# Altium PCB micro_pcb.PcbDoc
Units mil, origin at the board's own origin, x right, y up, seen from the top; angles counter-clockwise.
Board outline 2100 x 1500 mil, 4 copper layers (Top Layer, Power Plane, Ground Plane, Bottom Layer), stack 61.6 mil thick; 32 components, 49 nets, 227 pads, 0 vias.
Unrouted connection lines stored in the file: 34.
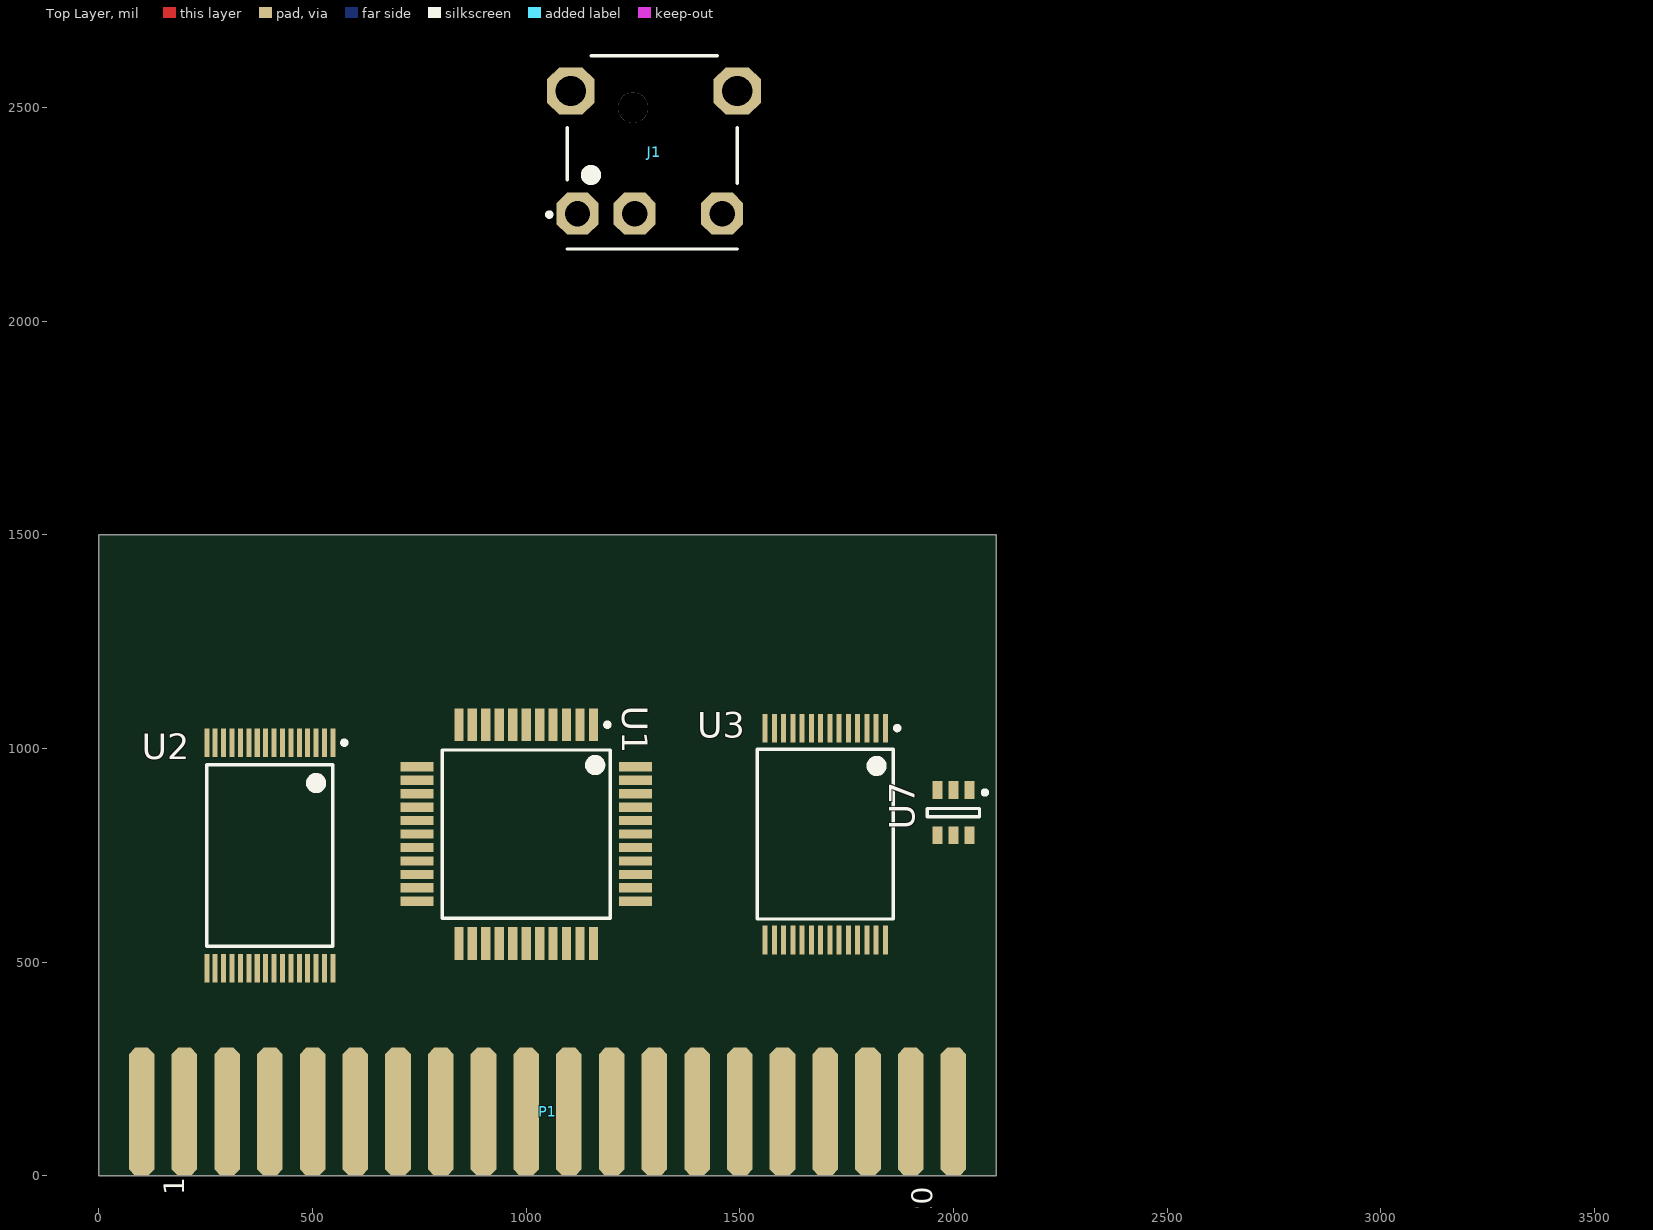
[diagram p0: Top Layer view]
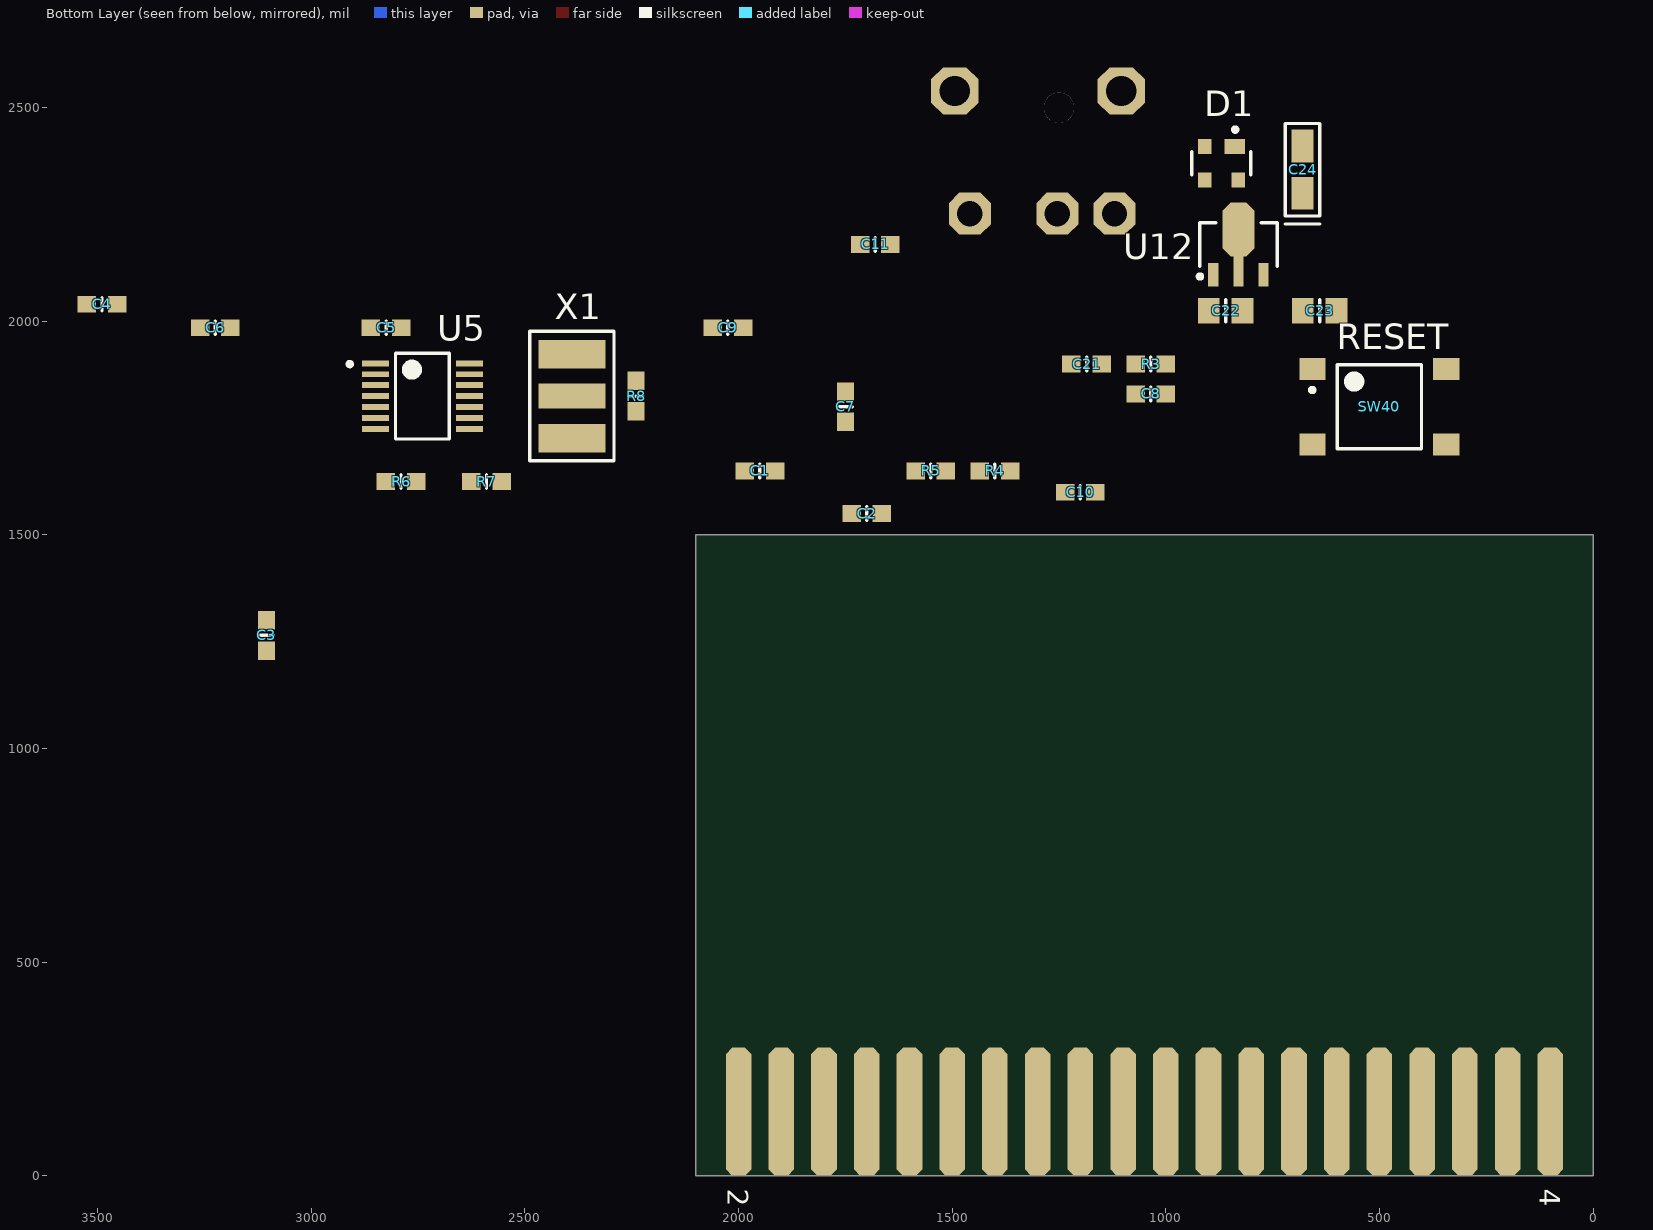
[diagram p1: Bottom Layer view, seen from below]
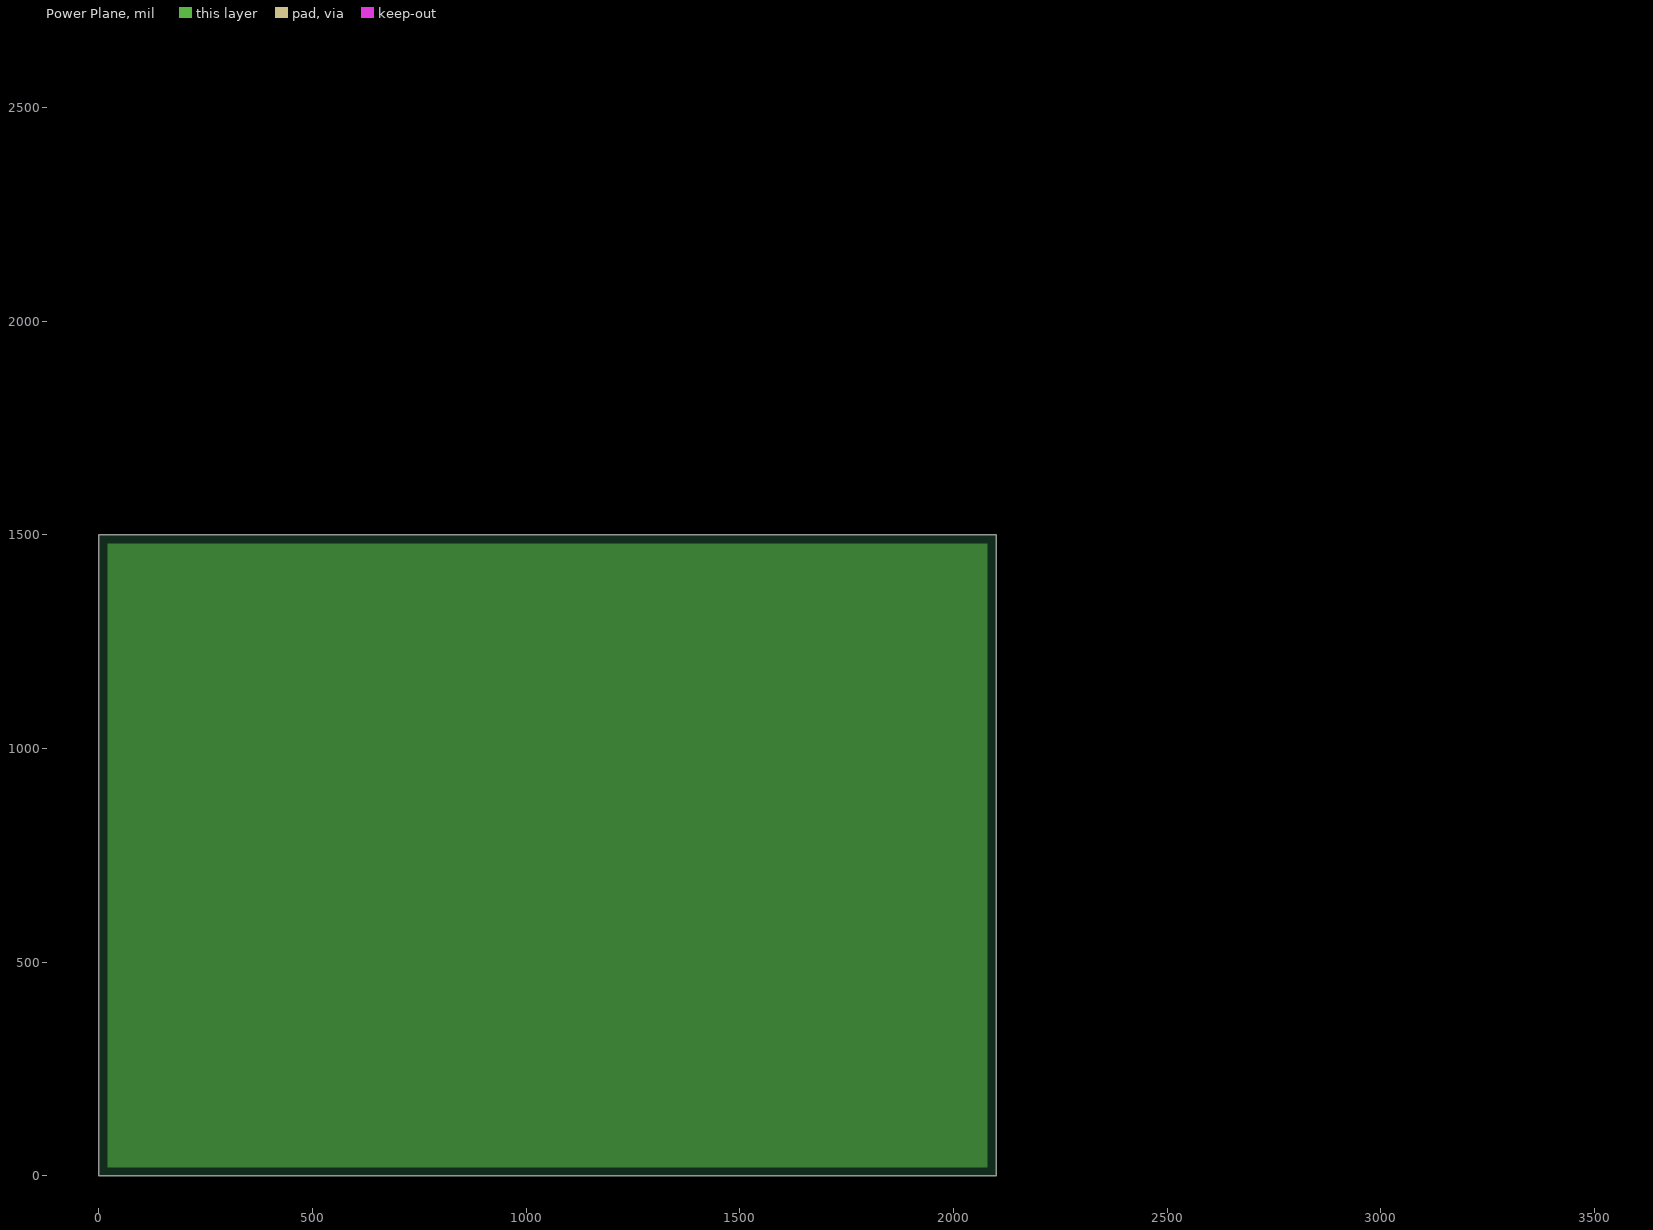
[diagram p2: Power Plane, clearances drawn from the general rule]
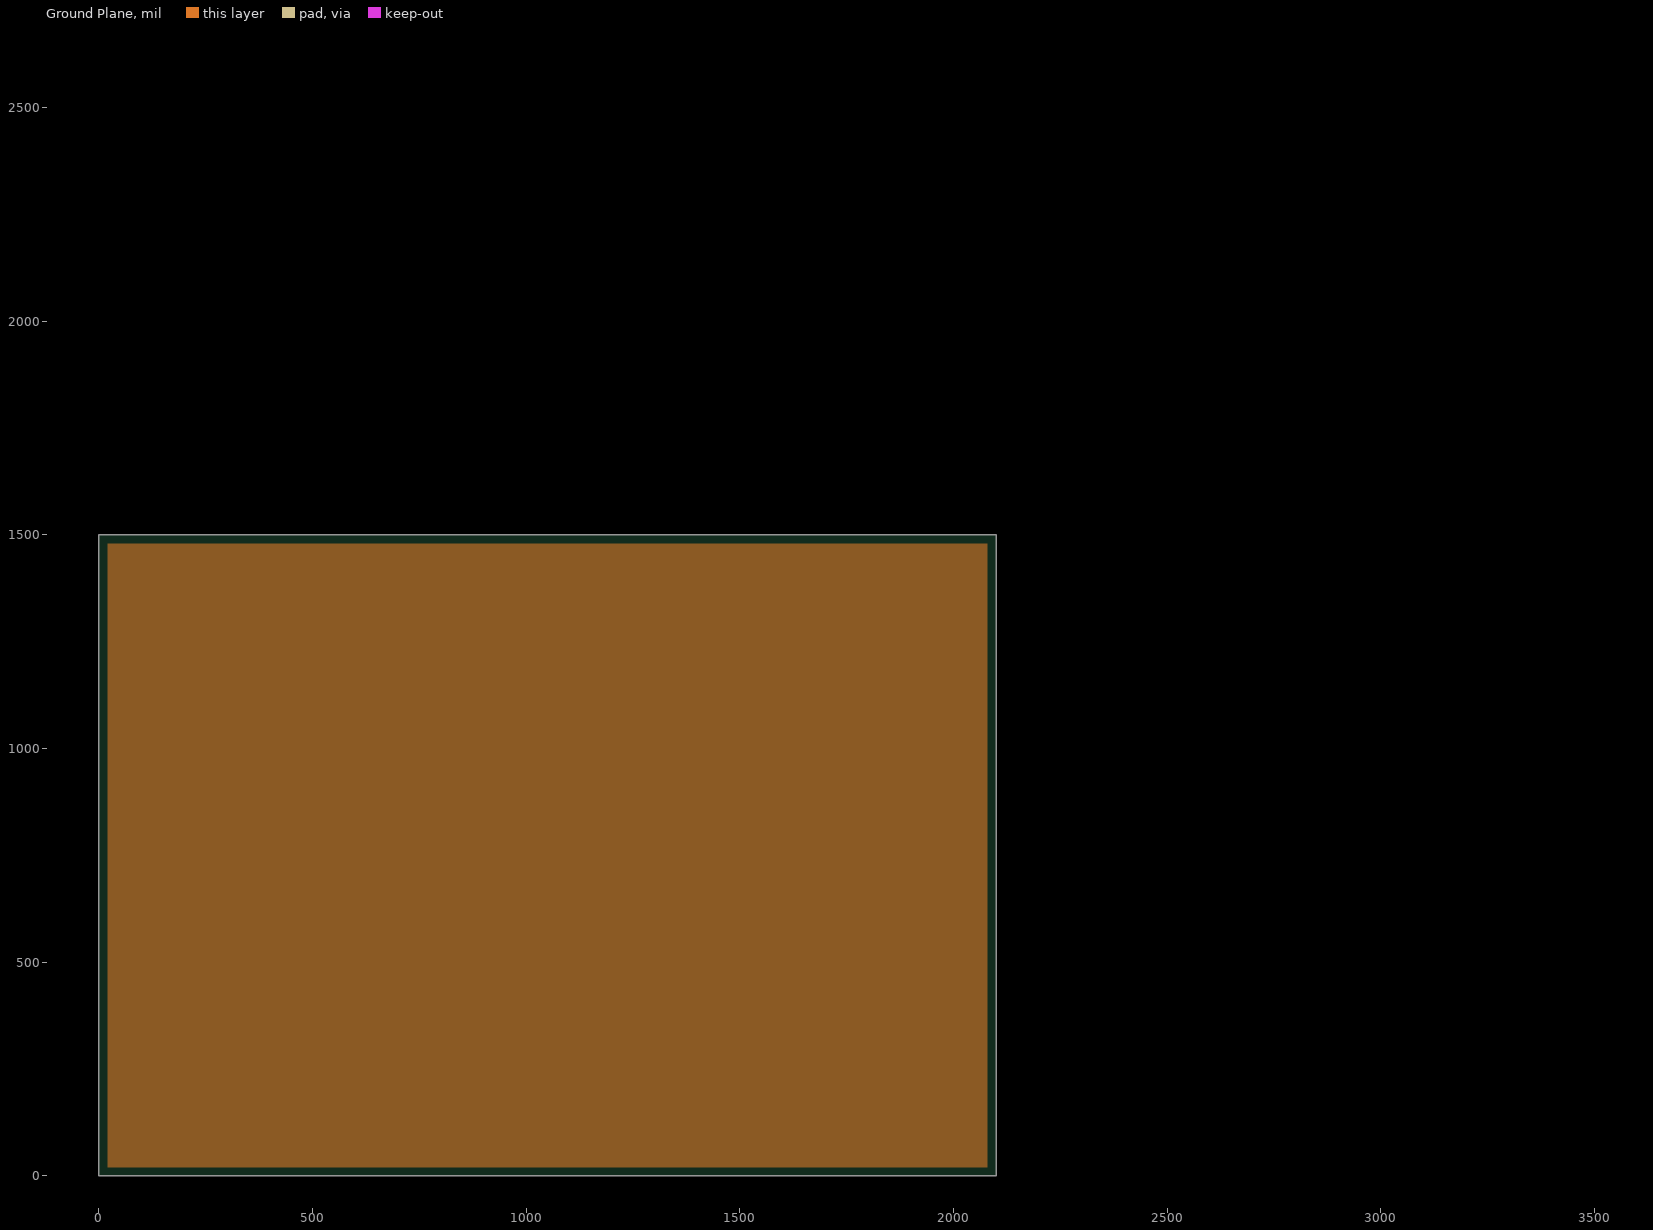
[diagram p3: Ground Plane, clearances drawn from the general rule]

## Layer stack, top to bottom
Top Layer: signal copper 2.1
Dielectric: core 14, FR-4, Dk 4.2
Power Plane: plane copper 0.7, net VCC
Dielectric: prepreg 28, FR-4, Dk 4.2
Ground Plane: plane copper 0.7, net GND
Dielectric: core 14, FR-4, Dk 4.2
Bottom Layer: signal copper 2.1

## Board outline
0,0 2100,0 2100,1500 0,1500 0,0

## Design rules (kind name [scope] priority, off if disabled: settings)
AcuteAngle [All] p1 off: minimum=9.00000000000000E+0001
Clearance Clearance_1 [All] p1: gap=7
Clearance "Clearance Poly" [All vs (InPolygon)] p2: gap=11.81
Clearance "Clearance All" [All] p3: gap=5.8
Clearance "Clearance xtal" [(InComponent('X1')) vs InNet('NetR8_1') AND InNet('NetR8_2')] p4: gap=0 // SMD crystal clearance
DiffPairsRouting [All] p1 off: maxlimit=10 minlimit=10 mostfreqgap=10 maxuncoupledlength=500
FabricationTestPointUsage TestPointUsage [All] p1 off: valid=0 allowmultiple=TRUE
FabricationTestpoint Testpoint [(IsPad And (OnTopLayer Or OnBottomLayer))] p1 off: side=3 testpointundercomponent=TRUE minsize=40 maxsize=100 preferedsize=60 minholesize=0 maxholesize=40 preferedholesize=32 testpointgrid=5 allowsidetop=TRUE allowsidebottom=TRUE usegrid=TRUE gridtolerance=0.01
FanoutControl Fanout_BGA [IsBGA] p1 off: bgadir=Out bgaviamode=Centered fanoutstyle=Auto fanoutdirection=Alternating viagrid=1 // Fanout_BGA (Default Rule)
FanoutControl Fanout_LCC [IsLCC] p2 off: bgadir=Out bgaviamode=Centered fanoutstyle=Auto fanoutdirection=Alternating viagrid=1 // Fanout_LCC (Default Rule)
FanoutControl Fanout_SOIC [IsSOIC] p3 off: bgadir=Out bgaviamode=Centered fanoutstyle=Auto fanoutdirection=Alternating viagrid=1 // Fanout_SOIC (Default Rule)
FanoutControl Fanout_Small [(CompPinCount < 5)] p4 off: bgadir=Out bgaviamode=Centered fanoutstyle=Auto fanoutdirection=OutThenIn viagrid=1 // Fanout_Small (Default Rule)
FanoutControl Fanout_Default [All] p5 off: bgadir=Out bgaviamode=Centered fanoutstyle=Auto fanoutdirection=Alternating viagrid=1 // Fanout_Default (Default Rule)
Height [All] p1 off: minheight=0 maxheight=1000 prefheight=500
HoleSize [All] p1: absolutevalues=TRUE maxlimit=250 minlimit=10 maxpercent=80.000 minpercent=20.000
MinimumAnnularRing "MinimumAnnularRing Via" [(IsVia)] p1: minimumring=5
MinimumAnnularRing "MinimumAnnularRing Pad" [All] p2: minimumring=10
MinimumSolderMaskSliver [All] p1: minsoldermaskwidth=4
PlaneClearance PlaneClearance_1 [ISVIA] p1: clearance=15
PlaneClearance [All] p2: clearance=20
PlaneConnect "PlaneConnect Via" [(IsVia)] p1: planeconnectstyle=Direct reliefexpansion=20 reliefentries=4 reliefconductorwidth=10 reliefairgap=10
PlaneConnect "PlaneConnect Pad" [All] p2: planeconnectstyle=Relief reliefexpansion=15 reliefentries=4 reliefconductorwidth=15 reliefairgap=15
PolygonConnect [All] p1: connectstyle=Relief reliefconductorwidth=10 reliefentries=4 polygonreliefangle="90 Angle"
RoutingCorners [All] p1 off: cornerstyle=45-Degree minsetback=100 maxsetback=100
RoutingPriority [All] p1: routingpriority=1
RoutingVias [All] p1: holewidth=12 width=22 viastyle="Through Hole" minholewidth=12 minwidth=22 maxholewidth=12 maxwidth=22
SMDToCorner [All] p1: distance=100000
SilkscreenOverComponentPads [All] p1: minsilkscreentomaskgap=5
SolderMaskExpansion SolderMaskExpansion_VIA [Isvia] p1: expansion=-50
SolderMaskExpansion [All] p2: expansion=0
Width "Width Power" [InNetClass('Power')] p1: maxlimit=100 minlimit=20 preferedwidth=50
Width [All] p2: maxlimit=100 minlimit=10 preferedwidth=15
12 further rules are at their usual default settings.

## Components (designator, comment, footprint, x,y, rotation, side; value= is the part's Value field where it differs from the comment)
C1 "0.1uF" 0603 1950,1650 r180 bottom
C2 "0.1uF" 0603 1700,1550 r0 bottom
C3 "0.1uF" 0603 3105,1265 r90 bottom
C4 "0.1uF" 0603 3490,2040 r180 bottom
C5 "0.1uF" 0603 2825,1985 r180 bottom
C6 "0.1uF" 0603 3225,1985 r0 bottom
C7 "0.1uF" 0603 1750,1800 r270 bottom
C8 "0.1uF" 0603 1035,1830 r180 bottom
C9 "0.1uF" 0603 2025,1985 r0 bottom
C10 "0.1uF" 0603 1200,1600 r0 bottom
C11 "0.1uF" 0603 1680,2180 r180 bottom
C21 "0.1uF" 0603 1185.43,1900 r180 bottom
C22 "1uF" 0805 860,2025 r0 bottom
C23 "1uF" 0805 640,2025 r180 bottom
C24 "10uF" 1206_A 680,2355 r90 bottom
D1 "BAS 3007A-RPP E6327" SOT143 870,2370 r0 bottom
J1 "PJ-051A" PJ-051A 1250,2500 r270 top
P1 "CWR-170-40-0000" "CARD EDGE 40 PIN" 1050,150 r180 top
R3 "10K" 0603 1035,1900 r180 bottom
R4 "10K" 0603 1400,1650 r180 bottom
R5 "10K" 0603 1550,1650 r0 bottom
R6 "10K" 0603 2790,1625 r180 bottom
R7 "10K" 0603 2590,1625 r0 bottom
R8 "1M" 0603 2240,1825 r270 bottom
SW40 "RESET" "PTS645SM43SMTR LFS" 500,1800 r180 bottom
U1 "Z84C0010AEG" LQFP-44 1000,800 r270 top
U2 "SST39SF010A-70-4C-WHE" SST39SF010A-70-4C-WHE 400,750 r270 top
U3 "IS62C256AL-45TLI" IS62C256AL-45TLI 1700,800 r270 top
U5 "SN74HC14PWR" PW014 2740,1825 r180 bottom
U7 "SN74LVC1G19DBVR" "SOT-23-6 DBV R-PDSO-G6" 2000,850 r270 top
U12 "MCP1702T-5002E/MB" SOT-89 830,2179.57 r90 bottom
X1 "AWSCR-3.58MGD-T" AWSCR-MG 2390,1825 r90 bottom

## Footprints (in the part's own frame and the unit in brackets; to place one, negate y for a bottom-side part, rotate by r counter-clockwise, add the part's x,y. Pads: shape width x height; smd on the part's side, far side on the other; paste and mask are expansions set on the pad)
0603 [mm]
  rect 1.1x1 smd: 1(-0.9,0) 2(0.9,0)
  silkscreen extent 0,-0.4 0,0.4, body extent -0.87,-0.47 0.87,0.47, height 0.8
0805 [mm]
  rect 1.3x1.5 smd: 1(-1,0) 2(1,0)
  silkscreen extent 0,-0.65 0,0.65, body extent -1.1,-0.72 1.1,0.72, height 1.27
1206_A [mm]
  rect 1.95x1.3 smd: 1(-1.4,0) 2(1.4,0)
  silkscreen extent -3.23,-1.02 2.75,1.02, body extent -1.6,-0.8 1.6,0.8, height 1.8
AWSCR-MG [mm] "CERAMIC RESONATOR 7.4 x 3.4 x 1.8mm 3-SMD"
  rect 1.7x4 smd: 1(-2.5,0) 3(2.5,0)
  rect 1.5x4 smd: 2(0,0)
  silkscreen extent -3.85,-2.5 3.85,2.5, body extent -3.7,-1.7 3.7,1.7, height 1.8
"CARD EDGE 40 PIN" [mil] "CARD EDGE 40 PIN FOR CWR-170-40-0000"
  oct 60x300 smd paste-39.37: 1(950,0) 2(850,0) 3(750,0) 4(650,0) 5(550,0) 6(450,0) 7(350,0) 8(250,0) 9(150,0) 10(50,0) 11(-50,0) 12(-150,0) 13(-250,0) 14(-350,0) 15(-450,0) 16(-550,0) 17(-650,0) 18(-750,0) 19(-850,0) 20(-950,0)
  oct 60x300 smd far side paste-39.37: 21(-950,0) 22(-850,0) 23(-750,0) 24(-650,0) 25(-550,0) 26(-450,0) 27(-350,0) 28(-250,0) 29(-150,0) 30(-50,0) 31(50,0) 32(150,0) 33(250,0) 34(350,0) 35(450,0) 36(550,0) 37(650,0) 38(750,0) 39(850,0) 40(950,0)
IS62C256AL-45TLI [mm] "IC SRAM 256KBIT 45NS 28TSOP"
  rect 1.7x0.3 smd: 1(-6.3,3.575) 2(-6.3,3.025) 3(-6.3,2.475) 4(-6.3,1.925) 5(-6.3,1.375) 6(-6.3,0.825) 7(-6.3,0.275) 8(-6.3,-0.275) 9(-6.3,-0.825) 10(-6.3,-1.375) 11(-6.3,-1.925) 12(-6.3,-2.475) 13(-6.3,-3.025) 14(-6.3,-3.575) 15(6.3,-3.575) 16(6.3,-3.025) 17(6.3,-2.475) 18(6.3,-1.925) 19(6.3,-1.375) 20(6.3,-0.825) 21(6.3,-0.275) 22(6.3,0.275) 23(6.3,0.825) 24(6.3,1.375) 25(6.3,1.925) 26(6.3,2.475) 27(6.3,3.025) 28(6.3,3.575)
  silkscreen extent -6.42,-4.05 5.05,4.4, body extent -5.95,-4.05 5.95,4.05, height 1.2
LQFP-44 [mm] "44-Lead Plastic Low-Profile Quad Flat Package (10 x 10 x 1.4 mm)"
  rect 1.95x0.55 smd: 1(-6.5,4) 2(-6.5,3.2) 3(-6.5,2.4) 4(-6.5,1.6) 5(-6.5,0.8) 6(-6.5,0) 7(-6.5,-0.8) 8(-6.5,-1.6) 9(-6.5,-2.4) 10(-6.5,-3.2) 11(-6.5,-4) 23(6.5,-4) 24(6.5,-3.2) 25(6.5,-2.4) 26(6.5,-1.6) 27(6.5,-0.8) 28(6.5,0) 29(6.5,0.8) 30(6.5,1.6) 31(6.5,2.4) 32(6.5,3.2) 33(6.5,4)
  rect 0.55x1.95 smd: 12(-4,-6.5) 13(-3.2,-6.5) 14(-2.4,-6.5) 15(-1.6,-6.5) 16(-0.8,-6.5) 17(0,-6.5) 18(0.8,-6.5) 19(1.6,-6.5) 20(2.4,-6.5) 21(3.2,-6.5) 22(4,-6.5) 34(4,6.5) 35(3.2,6.5) 36(2.4,6.5) 37(1.6,6.5) 38(0.8,6.5) 39(0,6.5) 40(-0.8,6.5) 41(-1.6,6.5) 42(-2.4,6.5) 43(-3.2,6.5) 44(-4,6.5)
  silkscreen extent -6.62,-5 5,5, body extent -5,-5 5,5, height 1.6
PJ-051A [mm] "DC POWER JACK"
  oct 2.5x2.5 hole 1.5: 1(6.3,-3.3) 2(6.3,5.3) 3(6.3,0.1)
  oct 2.8x2.8 hole 1.8: 4(-1,-3.7) 5(-1,6.2)
  round 1.8 hole 1.8 unplated: 6(0,0)
  silkscreen extent -3.1,-5.1 8.4,6.2, body extent -3.1,-3.9 8.4,6.2, height 7.3
"PTS645SM43SMTR LFS" [mm] "SWITCH TACT 6MM 160GF H=4.3MM"
  rect 1.55x1.3 smd: 1(-3.975,2.25) 2(3.975,2.25) 3(-3.975,-2.25) 4(3.975,-2.25)
  silkscreen extent -4.13,-2.5 2.5,2.5, body extent -3,-3 3,3, height 4.3
PW014 [mm]
  rect 1.6x0.35 smd: 1(-2.8,1.95) 2(-2.8,1.3) 3(-2.8,0.65) 4(-2.8,0) 5(-2.8,-0.65) 6(-2.8,-1.3) 7(-2.8,-1.95) 8(2.8,-1.95) 9(2.8,-1.3) 10(2.8,-0.65) 11(2.8,0) 12(2.8,0.65) 13(2.8,1.3) 14(2.8,1.95)
  silkscreen extent -4.44,-2.55 1.6,2.55, body extent -2.25,-2.55 2.25,2.55, height 1.2
SOT143 [mm] "SOT-143; 4 Leads; Body 3 x 2.6 mm, inc. leads (LxW max)"
  rect 1.2x0.9 smd paste+0: 1(-0.8,-1)
  rect 0.8x0.9 smd: 2(1,-1) 3(1,1) 4(-1,1)
  silkscreen extent -1.75,-2.12 1.75,0.7, body extent -1.5,-0.7 1.5,0.7, height 1.1
"SOT-23-6 DBV R-PDSO-G6" [mm] "SOT-23-6 TI DBV"
  rect 1.05x0.6 smd: 1(-1.35,0.95) 2(-1.35,0) 3(-1.35,-0.95) 4(1.35,-0.95) 5(1.35,0) 6(1.35,0.95)
  silkscreen extent -1.32,-1.55 0.25,2, body extent -0.8,-1.45 0.8,1.45, height 1.1
SOT-89 [mm]
  rect 1.4x0.6 smd: 1(-1.8,1.5) 3(-1.8,-1.5)
  rect 1.8x0.6 smd: 2(-1.6,0)
  oct 3.2x1.9 smd: 2(0.9,0)
  silkscreen extent -2.02,-2.3 1.3,2.41, body extent -1.3,-2.3 1.3,2.3, height 1.6
SST39SF010A-70-4C-WHE [mm] "IC FLASH MPF 1MBIT 70NS 32TSOP"
  rect 1.7x0.3 smd: 1(-6.7,3.75) 2(-6.7,3.25) 3(-6.7,2.75) 4(-6.7,2.25) 5(-6.7,1.75) 6(-6.7,1.25) 7(-6.7,0.75) 8(-6.7,0.25) 9(-6.7,-0.25) 10(-6.7,-0.75) 11(-6.7,-1.25) 12(-6.7,-1.75) 13(-6.7,-2.25) 14(-6.7,-2.75) 15(-6.7,-3.25) 16(-6.7,-3.75) 17(6.7,-3.75) 18(6.7,-3.25) 19(6.7,-2.75) 20(6.7,-2.25) 21(6.7,-1.75) 22(6.7,-1.25) 23(6.7,-0.75) 24(6.7,-0.25) 25(6.7,0.25) 26(6.7,0.75) 27(6.7,1.25) 28(6.7,1.75) 29(6.7,2.25) 30(6.7,2.75) 31(6.7,3.25) 32(6.7,3.75)
  silkscreen extent -6.82,-3.75 5.4,4.55, body extent -6.2,-4 6.2,4, height 1

## Part data
C1 C2 C3 C4 C5 C6 C7 C8 C9 C10 C11 C21: library part C0603, "CAP .10UF 16V CERAMIC X7R 0603"
C22 C23: library part C0805, "CAP 1.0UF 16V CERAMIC X7R 0805"
C24: library part T491A, "CAPACITOR TANT 10UF 10V 10% SMD"
D1: "DIODE SCHOTTKY 30V 900MA SOT143"
J1: "CON PWR JCK 2.0 X 6.0MM W/SHLD"
P1: "CONN CARD EDGE 40PIN GOLD"
R3 R4 R5 R6 R7: library part MCR03EZPFX, "RES 10.0K OHM 1/10W 1% 0603 SMD"
R8: library part MCR03EZPFX, "RES 1.00M OHM 1/10W 1% 0603 SMD"
SW40: library part "PTS645SM43SMTR LFS", "SWITCH TACT 6MM 160GF H=4.3MM"
U1: "IC Z80 CPU CMOS 10MHZ 44LQFP"
U2: "IC FLASH MPF 1MBIT 70NS 32TSOP"
U3: "IC SRAM 256KBIT 45NS 28TSOP"
U5: "IC HEX SCHMITT-TRIG INV 14-TSSOP"
U7: "IC MUX/DECODER SNGL 1OF2 SOT23-6"
U12: "IC REG LDO 5V 250MA SOT-89-3"
X1: "RESONATOR CER 3.58MHZ W/CAP SMD"

## Nets (pads, with @x,y where several pads share a name; then routed paths per layer and width w, separated by ;. In a path a pad name is that pad's centre, name@x,y a point inside that pad or via, vN(x,y) a via of type N, cw(c..) or ccw(c..) an arc to the next point about the centre after c; other vN are vias at no path point)
A0: P1.31 U1.27 U2.20 U3.17
A1: P1.30 U1.28 U2.19 U3.16
A2: P1.29 U1.29 U2.18 U3.15
A3: P1.28 U1.30 U2.17 U3.14
A4: P1.27 U1.31 U2.16 U3.13
A5: P1.26 U1.32 U2.15 U3.12
A6: P1.25 U1.34 U2.14 U3.11
A7: P1.24 U1.35 U2.13 U3.10
A8: P1.23 U1.36 U2.3 U3.4
A9: P1.22 U1.37 U2.2 U3.3
A10: P1.21 U1.38 U2.31 U3.28
A11: P1.1 U1.40 U2.1 U3.2
A12: P1.2 U1.41 U2.12 U3.9
A13: P1.3 U1.42 U2.4 U3.5
A14: P1.4 U1.43 U2.5 U3.8
A15: P1.5 U1.44 U7.1
B\U\S\A\C\K: P1.38 U1.20
B\U\S\R\E\Q\: P1.36 R5.2 U1.22
CLK: P1.6 U1.1 U5.8
D0: P1.14 U1.9 U2.21 U3.18
D1: P1.15 U1.10 U2.22 U3.19
D2: P1.12 U1.7 U2.23 U3.20
D3: P1.8 U1.3 U2.25 U3.22
D4: P1.7 U1.2 U2.26 U3.23
D5: P1.9 U1.4 U2.27 U3.24
D6: P1.10 U1.5 U2.28 U3.25
D7: P1.13 U1.8 U2.29 U3.26
FLASHC\E\: U2.30 U7.6
GND: C1.1 C2.1 C3.1 C4.1 C5.1 C6.1 C7.1 C8.1 C9.1 C10.1 C11.1 C21.1 C22.2 C23.2 C24.2 D1.1 P1.32 R6.1 R7.1 SW40.1 SW40.2 U1.26 U2.24 U3.21 U7.2 U12.1 X1.2
H\A\L\T\: P1.18 U1.14
I\N\T\: P1.16 U1.12
I\O\R\Q\: P1.20 U1.16
M\1\: P1.34 U1.24
M\R\E\Q\: P1.19 U1.15 U7.3
NetC22_1: C22.1 D1.4 U12.2
NetD1_2: D1.2 J1.2
NetD1_3: D1.3 J1.1
NetR6_2: R6.2 U2.11
NetR7_2: R7.2 U2.10
NetR8_1: R8.1 U5.5 X1.3
NetR8_2: R8.2 U5.6 U5.9 X1.1
NMI: P1.17 U1.13
R\D\: P1.40 U1.18 U2.32 U3.1
R\F\S\H\: P1.33 U1.25
R\S\T\: C21.2 P1.35 R3.1 SW40.3 SW40.4 U1.23
RAMC\E\: U3.27 U7.4
VCC: C1.2 C2.2 C3.2 C4.2 C5.2 C6.2 C7.2 C8.2 C9.2 C10.2 C11.2 C23.1 C24.1 R3.2 R4.1 R5.1 U1.6 U2.8 U3.7 U7.5 U12.3
W\A\I\T\: P1.37 R4.2 U1.21
W\R\: P1.39 U1.19 U2.7 U3.6
pads on no net: J1.3 J1.4 J1.5 J1.6 P1.11 U1.11 U1.17 U1.33 U1.39 U2.6 U2.9 U5.1 U5.2 U5.3 U5.4 U5.7 U5.10 U5.11 U5.12 U5.13 U5.14

## Polygon pours and split planes (outlines as drawn)
VCC on Power Plane (split plane): 2079.9,20.1 20.1,20.1 20.1,1479.9 2079.9,1479.9
GND on Ground Plane (split plane): 2079.9,20.1 20.1,20.1 20.1,1479.9 2079.9,1479.9

## Other copper
Top Layer:
  text ".Layer_Name" at -3.78,-602.05 h100
  text "Minna V0.1" at 0,-800 h100
Bottom Layer:
  text ".Layer_Name" at -3.78,-602.05 h100
  text "Minna V0.1" at 0,-800 h100
Power Plane (plane layer: these items are gaps in the copper):
  text ".Layer_Name" at -3.78,-602.05 h100
  text "Minna V0.1" at 0,-800 h100
Ground Plane (plane layer: these items are gaps in the copper):
  text ".Layer_Name" at -3.78,-602.05 h100
  text "Minna V0.1" at 0,-800 h100

## Silkscreen, mask and mechanical layers (free items; w line width, h text height)
Top Overlay:
  text ".Layer_Name" at -3.78,-602.05 h100
  text "Minna V0.1" at 0,-800 h100
Bottom Overlay:
  text ".Layer_Name" at -3.78,-602.05 h100
  text "Minna V0.1" at 0,-800 h100
Bottom Paste:
  text ".Layer_Name" at -3.78,-602.05 h100
  text "Minna V0.1" at 0,-800 h100
Top Solder:
  text ".Layer_Name" at 0,-600 h100
  text "Minna V0.1" at 0,-800 h100
Bottom Solder:
  text ".Layer_Name" at 0,-600 h100
  text "Minna V0.1" at 0,-800 h100
Drill Guide:
  text ".Layer_Name" at -3.78,-602.05 h100
  text "Minna V0.1" at 0,-800 h100
Title Block:
  lines w5: -450,-574 -250,-574 ; -450,1298 -250,1298 ; -450,3178 -250,3178 ; 1926,-2450 1926,-2250 ; 1926,4850 1926,5050 ; 4298,-2450 4298,-2250 ; 4298,4850 4298,5050 ; 4350,-1950 8850,-1950 ; 4350,-1650 8850,-1650 ; 4350,-1350 5850,-1350 ; 5850,-2250 5850,-1650 5850,-1050 ; 6675,-2450 6675,-2250 ; 6675,4850 6675,5050 ; 7950,-2250 7950,-1950 ; 8850,-574 9050,-574 ; 8850,1298 9050,1298 ; 8850,3178 9050,3178 ; 4350,-2250 2950,-2250 2950,-1050 4350,-1050 ; 4350,-2250 8850,-2250 ; 4350,-2250 4350,-1050 ; 4350,-1050 5850,-1050 ; 5850,-1050 8850,-1050 8850,-2250 ; 8850,-2250 -250,-2250 -250,4850 8850,4850 8850,-2250 ; -450,-2450 -450,5050 9050,5050 9050,-2450 -450,-2450
  lines w9: 4060,4229.5 8690,4229.5 ; 4060,4390.2 8690,4390.2 ; 4000,2702 ccw(c4052,2702) 4052,2650 8698,2650 ccw(c8698,2702) 8750,2702 8750,4698 ccw(c8698,4698) 8698,4750 4052,4750 ccw(c4052,4698) 4000,4698 4000,2702
  text "1" at 722.34,4915 h70
  text "2" at 3080.35,4915 h70
  text "3" at 5457,4915 h70
  text "4" at 7832.35,4915 h70
  text "Layer Stack Up Detail for: Minna_V01.PcbDoc" at 4060,4490.6 h105
  text "Layer" at 4060,4330.2 h37
  text "Gerber" at 5057.38,4330.2 h37
  text "Copper" at 5549.59,4330.2 h37
  text "Dielectric" at 6102.21,4330.2 h37
  text "Dielectric" at 6680.73,4330.2 h37
  text "Dielectric" at 7418.2,4330.2 h37
  text "Dielectric" at 7996.71,4330.2 h37
  text "Name" at 4060,4256.2 h37
  text "Document" at 5057.38,4256.2 h37
  text "Thickness" at 5549.59,4256.2 h37
  text "Height" at 6102.21,4256.2 h37
  text "Material" at 6680.73,4256.2 h37
  text "Constant" at 7418.2,4256.2 h37
  text "Type" at 7996.71,4256.2 h37
  text "Top Solder Mask" at 4060,4110.42 h52
  text "(.GTS)" at 5057.38,4110.42 h52
  text "0.4mil" at 6102.21,4110.42 h52
  text "Solder Resist" at 6680.73,4110.42 h52
  text "3.50" at 7418.2,4110.42 h52
  text "A" at -375,4025 h70
  text "A" at 8920,4025 h70
  text "Top Layer" at 4060,3881.25 h52
  text "(.GTL)" at 5057.38,3881.25 h52
  text "2.1mil" at 5549.59,3881.25 h52
  text "14mil" at 6102.21,3766.67 h52
  text "FR-4" at 6680.73,3766.67 h52
  text "4.20" at 7418.2,3766.67 h52
  text "Core" at 7996.71,3766.67 h52
  text "Power Plane" at 4060,3652.08 h52
  text "(.GP1)" at 5057.38,3652.08 h52
  text "0.7mil" at 5549.59,3652.08 h52
  text "28mil" at 6102.21,3537.5 h52
  text "FR-4" at 6680.73,3537.5 h52
  text "4.20" at 7418.2,3537.5 h52
  text "PrePreg" at 7996.71,3537.5 h52
  text "Ground Plane" at 4060,3422.92 h52
  text "(.GP2)" at 5057.38,3422.92 h52
  text "0.7mil" at 5549.59,3422.92 h52
  text "14mil" at 6102.21,3308.33 h52
  text "FR-4" at 6680.73,3308.33 h52
  text "4.20" at 7418.2,3308.33 h52
  text "Core" at 7996.71,3308.33 h52
  text "Bottom Layer" at 4060,3193.75 h52
  text "(.GBL)" at 5057.38,3193.75 h52
  text "2.1mil" at 5549.59,3193.75 h52
  text "Bottom Solder Mask" at 4060,2964.58 h52
  text "(.GBS)" at 5057.38,2964.58 h52
  text "0.4mil" at 6102.21,2964.58 h52
  text "Solder Resist" at 6680.73,2964.58 h52
  text "3.50" at 7418.2,2964.58 h52
  text "ALL HOLES INDICATE FINISHED SIZE" at 4008,2508 h60
  text "MATERIAL ->" at 4008,2208 h60
  text "B" at -375,2149 h70
  text "B" at 8920,2149 h70
  text "MATERIAL: EPOXY FIBERGLASS FR4 TG170 OR EQUIVALENT," at 4108,2108 h60
  text "LAMINATE AND PREPREG (B-STAGE) TO BE IN ACCORDANCE WITH IPC-4101/24 OR IPC-4101/26." at 4108,2008 h60
  text "MATERIAL MUST MEET UL 94V-0 FLAMABILITY RATING." at 4108,1908 h60
  text "ACCEPTABILITY REQUIREMENTS PER IPC-A-600E." at 4108,1808 h60
  text "0.062\"" at 6208,1808 h60
  text "+/- 0.007\" FINISHED THICKNESS." at 6508,1808 h60
  text "THIS IS A 4 LAYER BOARD." at 4108,1708 h60
  text "FINISH ->" at 4008,1558 h60
  text "FINISHED COPPER THICKNESS TO BE" at 4108,1408 h60
  text "0.5" at 5658,1408 h60
  text "oz. EXTERNAL LAYERS," at 5808,1408 h60
  text "0.5" at 6808,1408 h60
  text "oz. INTERNAL LAYERS (MULTI-LAYERED)" at 6958,1408 h60
  text "SOLDER MASK OVER BARE COPPER, BOTH SIDES, L.P.I., BLACK IN COLOR. 0.002\" MAX THICKNESS" at 4108,1308 h60
  text "ALL EXPOSED CONDUCTIVE PATTERN AREAS NOT COVERED WITH SOLDERMASK OR OTHER PLATING" at 4108,1208 h60
  text "SHALL BE IMMERSION GOLD FINISH." at 4108,1108 h60
  text "SILKSCREEN SHALL BE WHITE, PERMANENT, ORGANIC, NON-CONDUCTIVE INK." at 4108,1008 h60
  text "THERE SHALL BE NO SILKSCREEN ON ANY SOLDERABLE COMPONENT PAD." at 4108,908 h60
  text "UL LOGO, MANUFACTURER'S IDENTIFICATION AND DATE CODE LETTER SHALL BE RENDERED IN ETCH ON" at 4108,808 h60
  text "THE TOP SIDE OF THE BOARD" at 4108,708 h60
  text "TOLERANCES ->" at 4008,558 h60
  text "WARP OR TWIST OF BOARD SHALL NOT EXCEED 1%." at 4108,408 h60
  text "CONDUCTOR WIDTHS AND SPACING SHALL BE WITHIN +/- 0.001\" OF GERBER DATA." at 4108,308 h60
  text "C" at -375,273 h70
  text "C" at 8920,273 h70
  text "HOLE LOCATION +/- 0.003\". MAXIMUM LAYER TO LAYER MIS-REGISTRAION SHALL BE 0.005\"" at 4108,208 h60
  text "HOLE DIAMETER TOLERANCE IS +/- 0.003\" AFTER PLATING" at 4108,108 h60
  text "REMOVE ALL BURRS AND BREAK SHARP EDGES 0.015\" MAXIMUM." at 4108,8 h60
  text "SURFACE MOUNT PAD PLATING MUST BE FLAT TO A MAXIMUM OF 0.08 (0.003\") ABOVE BOARD SURFACE." at 4108,-92 h60
  text "MINIMUM COPPER PLATING 0.001\" THICK FOR PLATED THROUGH HOLES." at 4108,-192 h60
  text "ENGINEER:" at 4400,-1150 h45
  text "TITLE:" at 5900,-1150 h45
  text "CHRIS HETTRICK" at 4450,-1270 h70
  text "SMARI" at 3050,-1300 h150
  text "PCB DESIGNER:" at 4400,-1445 h45
  text "Minna_V01" at 6100,-1500 h150
  text "103-3061 E KENT AVE N" at 3010,-1570 h70
  text "CHRIS HETTRICK" at 4450,-1570 h70
  text "D" at -375,-1599 h70
  text "D" at 8920,-1599 h70
  text "VANCOUVER, BC" at 3010,-1710 h70
  text "DATE:" at 4400,-1750 h45
  text "LAYER NAME:" at 5900,-1750 h45
  text "V5S 4P5" at 3010,-1850 h70
  text ".PRINT_DATE" at 4450,-1870 h70
  text "FILE NAME:" at 4400,-2050 h45
  text "PART NO.:" at 5900,-2050 h45
  text "REV.:" at 8000,-2050 h45
  text ".PCB_FILE_NAME_NO_PATH" at 4450,-2170 h70
  text "N/A" at 6350,-2170 h80
  text "0.1" at 8190,-2170 h70
  text "1" at 722.34,-2385 h70
  text "2" at 3080.35,-2385 h70
  text "3" at 5457,-2385 h70
  text "4" at 7832.35,-2385 h70
Component Body:
  text ".Layer_Name" at -3.78,-602.05 h100
  text "Minna V0.1" at 0,-800 h100
Assembly Top:
  text "smari" at 0,-175 h80
  text "Minna V0.1  Dec 27, 2011" at 0,-325 h80
  text "Not To Scale" at 0,-475 h80
Assembly Bottom:
  text "smari" at 2650,-175 h80
  text "Minna V0.1  Dec 27, 2011" at 2650,-325 h80
  text "Not To Scale" at 2650,-475 h80
Courtyard Top:
  text ".Layer_Name" at -3.78,-602.05 h100
  text "Minna V0.1" at 0,-800 h100
Courtyard Bottom:
  text ".Layer_Name" at -3.78,-602.05 h100
  text "Minna V0.1" at 0,-800 h100
Drill Drawing:
  lines w7.87: 0,0 3350,0 3350,50 3610,50 3650,90 3650,2110 3610,2150 3350,2150 3350,2200 0,2200 0,0
  text ".Layer_Name" at -3.78,-602.05 h100
  text ".Layer_Name" at -3.78,-602.05 h100
  text "Minna V0.1" at 0,-800 h100

## Dimensions
0,0 to 0,0 on Drill Drawing
0,0 to 0,0 on Drill Drawing
0,0 to 0,0 on Drill Drawing

## Text inside footprints (layer, text, board x,y; h text height)
P1: Bottom Overlay "40" at 125,-30 h48 r90; Bottom Overlay "21" at 2025,-30 h48 r90; Top Overlay "20" at 1950,-110 h48 r90; Top Overlay "1" at 200,-45 h48 r90